# Altium PCB esp32c2_devboard.PcbDoc
Units mm, origin at the board's own origin, x right, y up, seen from the top; angles counter-clockwise.
Board outline 24.13 x 26.67 mm, 4 copper layers (Top Layer, Layer 1, Layer 2, Bottom Layer), stack 1.586 mm thick; 3 components, 18 nets, 81 pads, 42 vias.
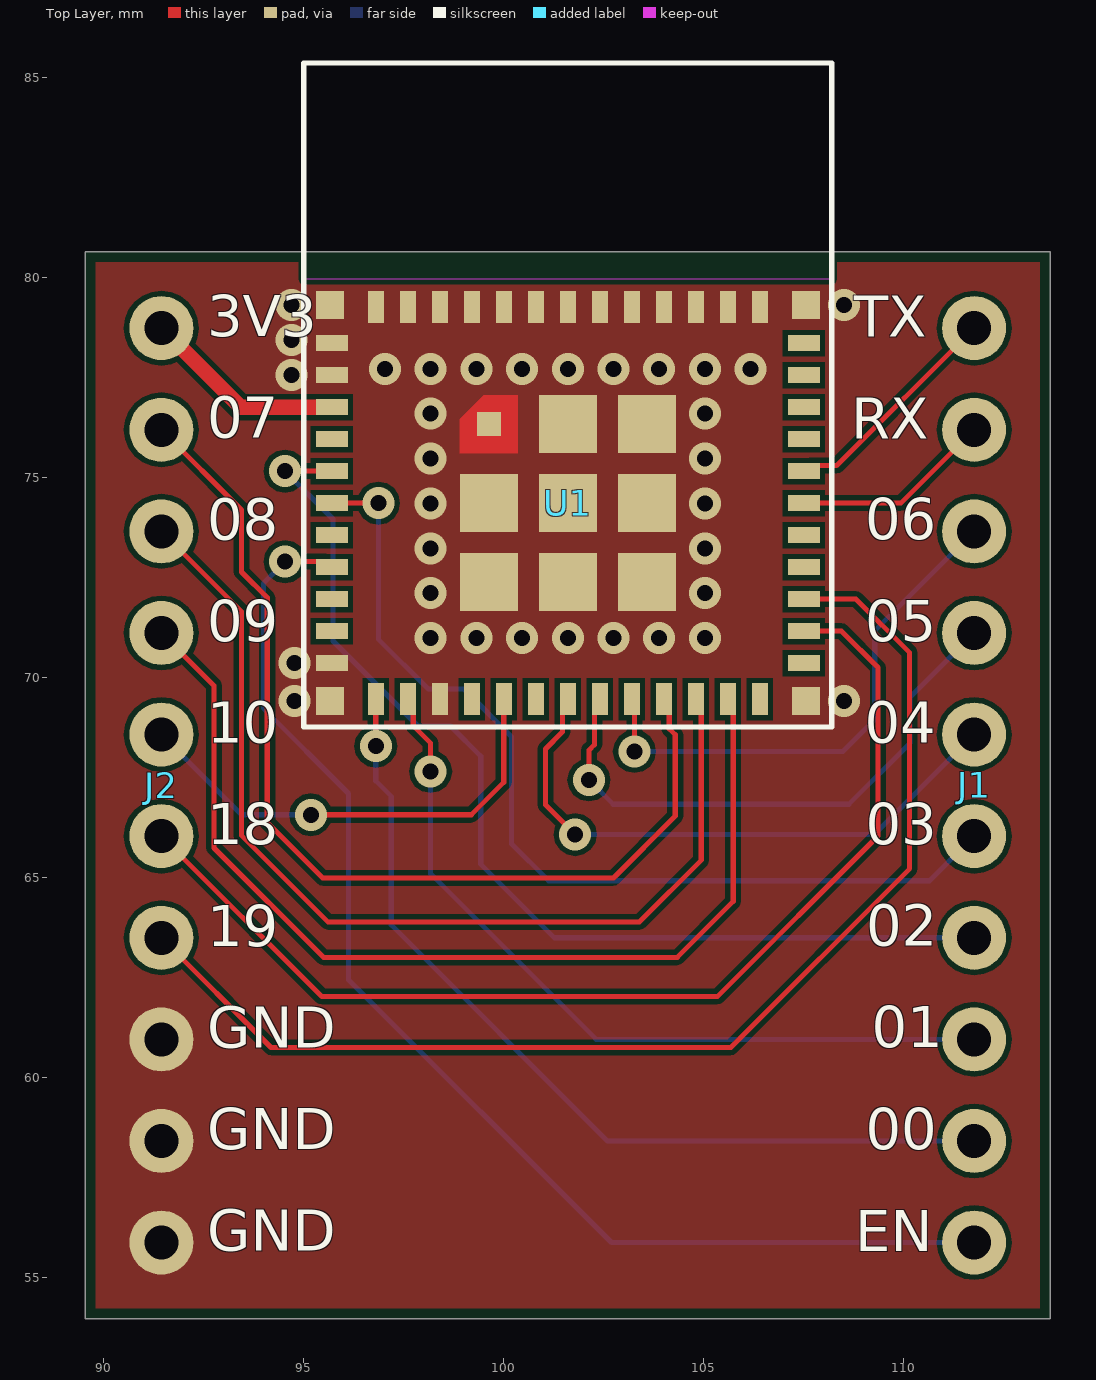
[diagram p0: Top Layer view]
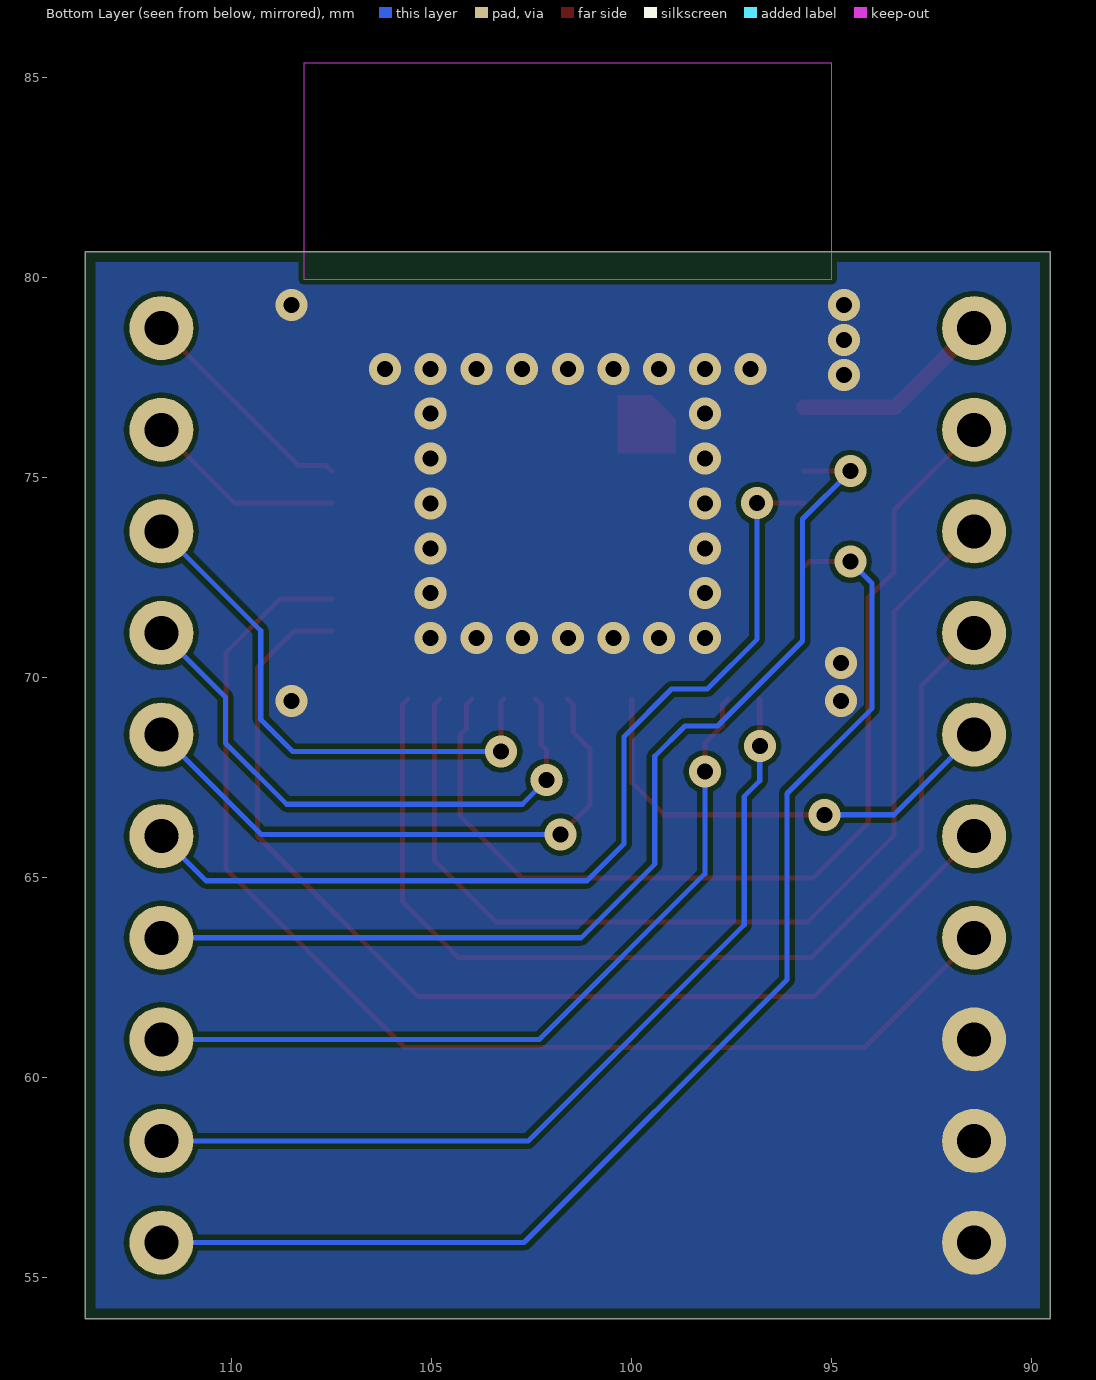
[diagram p1: Bottom Layer view, seen from below]
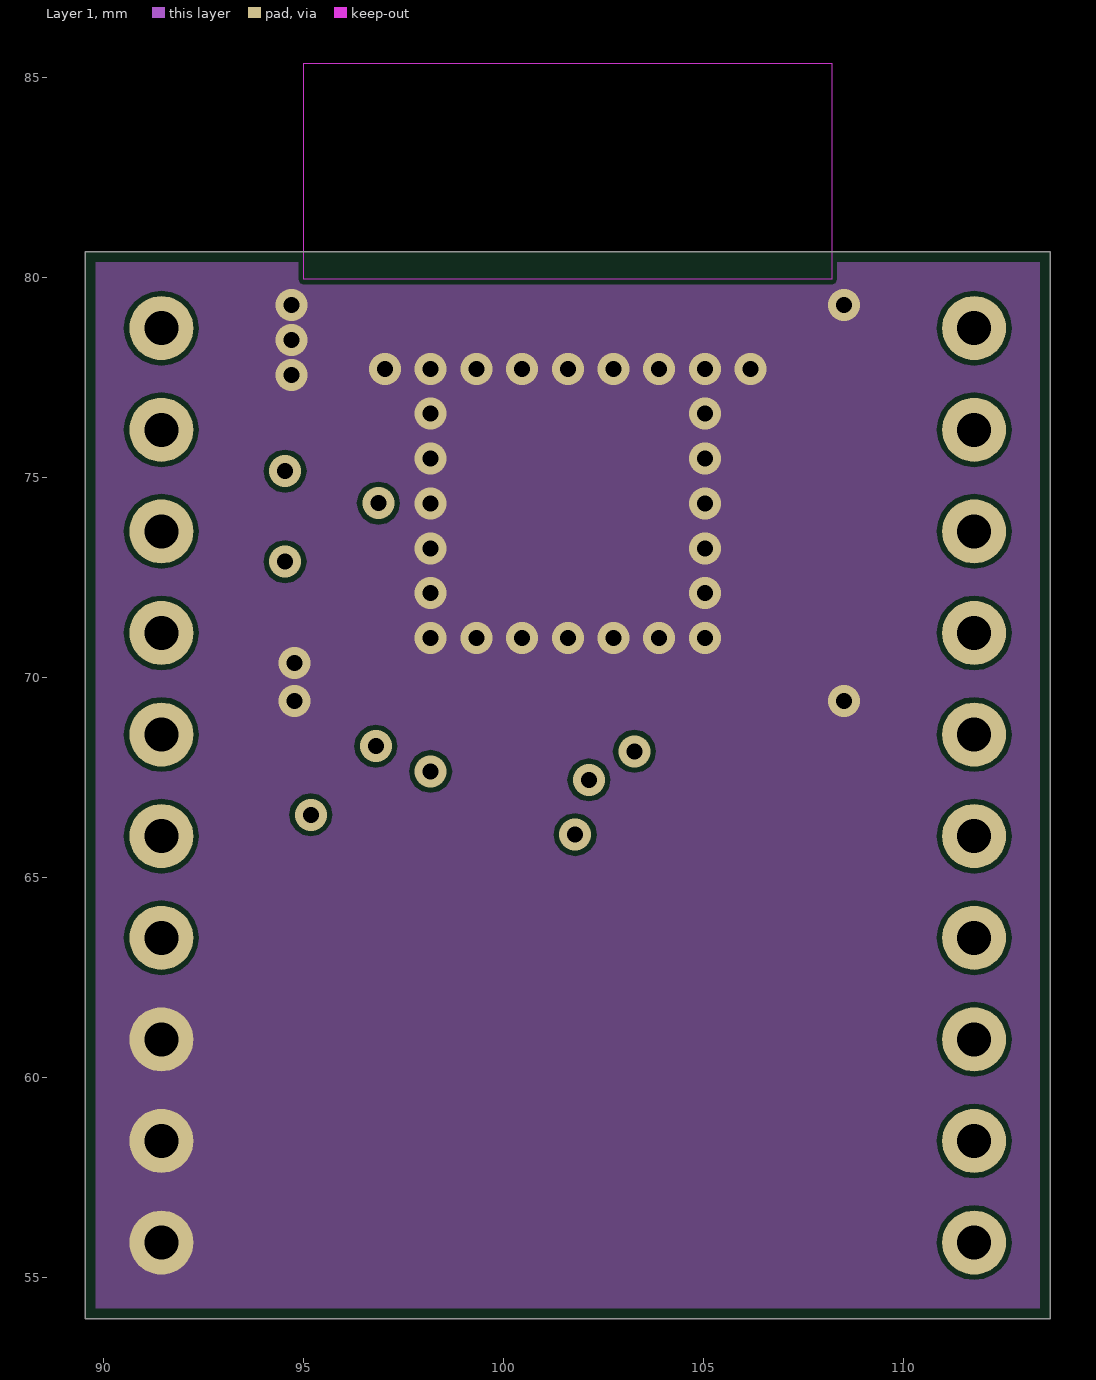
[diagram p2: Layer 1]
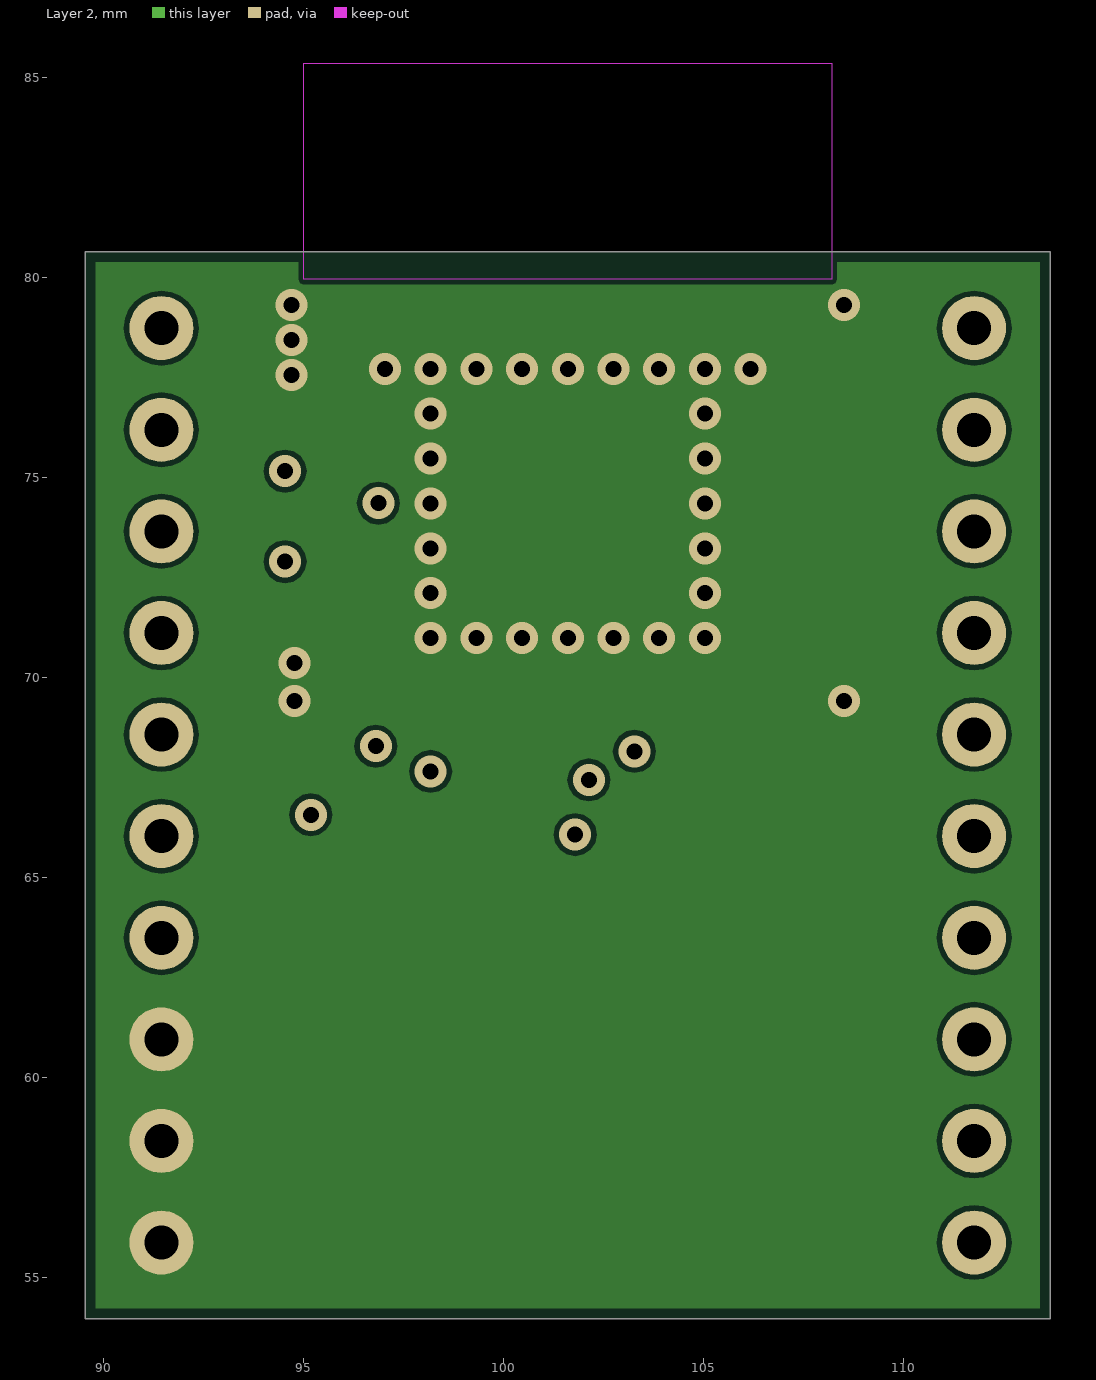
[diagram p3: Layer 2]

## Layer stack, top to bottom
Top Solder: solder mask 0.0254, SM-001, Dk 4
Top Layer: signal copper 0.035
Dielectric 2: prepreg 0.2104, PP-006, Dk 4.1
Layer 1: signal copper 0.0152
Dielectric 1: core 1.065, Core-043, Dk 4.3
Layer 2: signal copper 0.0152
Dielectric 3: prepreg 0.2104, PP-006, Dk 4.1
Bottom Layer: signal copper 0.035
Bottom Solder: solder mask 0.0254, SM-001, Dk 4

## Board outline
89.535,53.975 89.535,80.645 113.665,80.645 113.665,53.975

## Design rules (kind name [scope] priority, off if disabled: settings)
BoardOutlineClearance [OnSignal] p1: gap=0.254 ignorepadtopadclearanceinfootprint=FALSE
Clearance [All] p1: gap=0.127 ignorepadtopadclearanceinfootprint=FALSE
MinimumSolderMaskSliver [All] p1: minsoldermaskwidth=0.1
PolygonConnect PolygonConnect_Thermal [InNet('GND') vs InComponentClass('esp32c2_devboard') Or (InNet('GND') AND IsVia)] p1: connectstyle=Direct reliefconductorwidth=0.254 reliefentries=4 polygonreliefangle="90 Angle" airgapwidth=0.254
PolygonConnect [All] p2: connectstyle=Relief reliefconductorwidth=0.152 reliefentries=4 polygonreliefangle="90 Angle" airgapwidth=0.127
RoutingVias [All] p1: holewidth=0.711 width=1.27 viastyle="Through Hole" minholewidth=0.711 minwidth=1.27 maxholewidth=0.711 maxwidth=1.27 useviatemplates=TRUE viatemplateguid#1={FA8ABF8A-3428-4868-9827-40184CA6AFD4} viatemplatename#1=SIGNAL_VIA
SilkToSilkClearance [False] p1: silktosilkclearance=0.254
SilkToSolderMaskClearance [IsPad] p1: minsilkscreentomaskgap=0 clearancetoexposedcopper=TRUE
SolderMaskExpansion [All] p1: expansion=0.102 istentingtop=FALSE
Width [All] p1: maxlimit=0.508 minlimit=0.127 preferedwidth=0.254 toplayer_prefwidth=0.127 midlayer1_minwidth=0.254 midlayer1_maxwidth=0.254 midlayer2_minwidth=0.254 midlayer2_maxwidth=0.254 bottomlayer_prefwidth=0.127 minimp=50.000000 maximp=50.000000 favimp=50.000000
27 further rules are at their usual default settings.

## Classes and differential pairs
pad class Thermals: U1-49_1 U1-49_2 U1-49_3 U1-49_4 U1-49_5 U1-49_6 U1-49_7 U1-49_8 U1-49_9

## Components (designator, comment, footprint, x,y, rotation, side; value= is the part's Value field where it differs from the comment)
J1 "CON10" CON10 111.76,55.88 r90 top
J2 "CON10" CON10 91.44,78.74 r270 top
U1 "ESP32-C3-MINI-1-N4" XCVR_ESP32-C3-MINI-1-N4 101.6,77.065 r0 top

## Footprints (in the part's own frame and the unit in brackets; to place one, negate y for a bottom-side part, rotate by r counter-clockwise, add the part's x,y. Pads: shape width x height; smd on the part's side, far side on the other; paste and mask are expansions set on the pad)
CON10 [mm] "10 pin header"
  round 1.6 hole 0.85: 1(0,0) 2(2.54,0) 3(5.08,0) 4(7.62,0) 5(10.16,0) 6(12.7,0) 7(15.24,0) 8(17.78,0) 9(20.32,0) 10(22.86,0)
XCVR_ESP32-C3-MINI-1-N4 [mm]
  rect 0.8x0.4 smd: 1(-5.9,1.3) 2(-5.9,0.5) 3(-5.9,-0.3) 4(-5.9,-1.1) 5(-5.9,-1.9) 6(-5.9,-2.7) 7(-5.9,-3.5) 8(-5.9,-4.3) 9(-5.9,-5.1) 10(-5.9,-5.9) 11(-5.9,-6.7) 25(5.9,-6.7) 26(5.9,-5.9) 27(5.9,-5.1) 28(5.9,-4.3) 29(5.9,-3.5) 30(5.9,-2.7) 31(5.9,-1.9) 32(5.9,-1.1) 33(5.9,-0.3) 34(5.9,0.5) 35(5.9,1.3)
  rect 0.4x0.8 smd: 12(-4.8,-7.6) 13(-4,-7.6) 14(-3.2,-7.6) 15(-2.4,-7.6) 16(-1.6,-7.6) 17(-0.8,-7.6) 18(0,-7.6) 19(0.8,-7.6) 20(1.6,-7.6) 21(2.4,-7.6) 22(3.2,-7.6) 23(4,-7.6) 24(4.8,-7.6) 36(4.8,2.2) 37(4,2.2) 38(3.2,2.2) 39(2.4,2.2) 40(1.6,2.2) 41(0.8,2.2) 42(0,2.2) 43(-0.8,2.2) 44(-1.6,2.2) 45(-2.4,2.2) 46(-3.2,2.2) 47(-4,2.2) 48(-4.8,2.2)
  rect 0.6x0.6 smd paste-1 mask+0: 49_1(-1.975,-0.725)
  rect 1.45x1.45 smd: 49_2(0,-0.725) 49_3(1.975,-0.725) 49_4(1.975,-2.7) 49_5(1.975,-4.675) 49_6(0,-4.675) 49_7(-1.975,-4.675) 49_8(-1.975,-2.7) 49_9(0,-2.7)
  rect 0.7x0.7 smd: 50(5.95,2.25) 51(5.95,-7.65) 52(-5.95,-7.65) 53(-5.95,2.25)
  Top Layer region: -1.25,-1.45 -2.7,-1.45 -2.7,-0.6 -2.1,0 -1.25,0
  Keep-Out Layer region: 6.6,2.9 -6.6,2.9 -6.6,8.3 6.6,8.3
  Keep-Out Layer region: 6.6,2.9 -6.6,2.9 -6.6,8.3 6.6,8.3
  silkscreen extent -6.6,-8.3 6.6,8.3, body extent -6.6,-8.3 6.6,8.3, height 2.55

## Part data
U1: "Bluetooth, WiFi 802.11b/g/n, Bluetooth v5.0 Transceiver Module 2.412GHz ~ 2.484GHz PCB Trace Surface Mount", Package="SMD-53 Espressif Systems", Availability="In Stock", Check_prices=https://www.snapeda.com/parts/ESP32-C3-MINI-1-N4/Espressif+Systems/view-part/?ref=eda, MF="Espressif Systems", MP=ESP32-C3-MINI-1-N4, Price=None, Purchase-URL=https://pricing.snapeda.com/search/part/ESP32-C3-MINI-1-N4/?ref=eda, SnapEDA_Link=https://www.snapeda.com/parts/ESP32-C3-MINI-1-N4/Espressif+Systems/view-part/?ref=snap

## Via types
v1: diameter 0.8, hole 0.4, Top Layer to Bottom Layer, tented both sides, 42 vias

## Nets (pads, with @x,y where several pads share a name; then routed paths per layer and width w, separated by ;. In a path a pad name is that pad's centre, name@x,y a point inside that pad or via, vN(x,y) a via of type N, cw(c..) or ccw(c..) an arc to the next point about the centre after c; other vN are vias at no path point)
3V3: J2.1 U1.3 | length 5.1
  Top Layer w0.381: J2.1 93.415,76.765 U1.3
EN: J1.1 U1.8 | length 31.1
  Top Layer w0.127: v1(94.533,72.902) 95.563,72.902 U1.8
  Bottom Layer w0.127: v1(94.533,72.902) 93.99,72.359 93.99,69.239 96.121,67.108 96.121,62.451 102.692,55.88 J1.1
GND: J2.8 J2.9 J2.10 U1.1 U1.2 U1.11 U1.14 U1.36 U1.37 U1.38 U1.39 U1.40 U1.41 U1.42 U1.43 U1.44 U1.45 U1.46 U1.47 U1.48 U1.49_1 U1.49_2 U1.49_3 U1.49_4 U1.49_5 U1.49_6 U1.49_7 U1.49_8 U1.49_9 U1.50 U1.51 U1.52 U1.53
  other v1: 94.767,69.415 108.512,69.415 94.767,70.365 98.171,70.993 99.314,70.993 100.457,70.993 101.6,70.993 102.743,70.993 103.886,70.993 105.029,70.993 98.171,72.115 105.029,72.115 98.171,73.237 105.029,73.237 98.171,74.358 105.029,74.358 98.171,75.48 105.029,75.48 98.171,76.602 105.029,76.602 94.688,77.565 97.028,77.724 98.171,77.724 99.314,77.724 100.457,77.724 101.6,77.724 102.743,77.724 103.886,77.724 105.029,77.724 106.172,77.724 94.688,78.44 94.688,79.315 108.512,79.315
IO0: J1.2 U1.12 | length 22.6
  Top Layer w0.127: v1(96.8,68.288) U1.12
  Bottom Layer w0.127: v1(96.8,68.288) 96.8,67.423 97.188,67.034 97.188,63.822 102.591,58.42 J1.2
IO1: J1.3 U1.13 | length 19.9
  Top Layer w0.127: U1.13 97.736,69.328 97.736,68.8 98.172,68.364 v1(98.172,67.658)
  Bottom Layer w0.127: v1(98.172,67.658) 98.172,65.097 102.309,60.96 J1.3
IO2: J1.4 U1.5 | length 26.6
  Top Layer w0.127: v1(94.533,75.165) U1.5
  Bottom Layer w0.127: v1(94.533,75.165) 95.73,73.968 95.73,70.919 97.855,68.794 98.67,68.794 99.426,68.038 99.426,65.339 101.264,63.5 J1.4
IO3: J1.5 U1.6 | length 24
  Top Layer w0.127: U1.6 96.808,74.365 v1@96.84,74.333
  Bottom Layer w0.127: v1(96.865,74.365) 96.865,70.966 98.114,69.717 99.007,69.717 100.196,68.528 100.196,65.851 101.122,64.925 110.645,64.925 J1.5
IO4: J1.6 U1.18 | length 14.9
  Top Layer w0.127: U1.18 101.464,69.328 101.464,68.641 101.041,68.219 101.041,66.825 v1(101.786,66.08)
  Bottom Layer w0.127: v1(101.786,66.08) 109.26,66.08 J1.6
IO5: J1.7 U1.19 | length 14.5
  Top Layer w0.127: v1(102.129,67.445) 102.129,68.19 102.264,68.325 102.264,69.328 U1.19
  Bottom Layer w0.127: v1(102.129,67.445) 102.736,66.838 108.626,66.838 110.154,68.366 110.154,69.514 J1.7
IO6: J1.8 U1.20 | length 13.4
  Top Layer w0.127: U1.20 103.268,69.397 v1(103.268,68.161)
  Bottom Layer w0.127: v1(103.268,68.161) 104.201,68.161 108.479,68.161 109.275,68.957 109.275,71.175 J1.8
IO7: J2.2 U1.21 | length 25.4
  Top Layer w0.127: J2.2 93.445,74.195 93.445,72.646 94.087,72.004 94.087,66.383 95.474,64.997 102.741,64.997 104.287,66.543 104.287,68.575 104.136,68.726 104.136,69.328 U1.21
IO8: J2.3 U1.22 | length 25.5
  Top Layer w0.127: J2.3 93.447,71.653 93.447,66.052 95.601,63.899 103.396,63.899 104.937,65.44 104.937,69.328 U1.22
IO9: J2.4 U1.23 | length 25.7
  Top Layer w0.127: J2.4 92.758,69.802 92.758,65.745 95.492,63.011 104.337,63.011 105.736,64.411 105.736,69.328 U1.23
IO10: J2.5 U1.16 | length 11.8
  Top Layer w0.127: v1(95.175,66.575) 99.19,66.575 100,67.385 U1.16
  Bottom Layer w0.127: J2.5 93.445,66.575 v1(95.175,66.575)
IO18: J2.6 U1.26 | length 27.7
  Top Layer w0.127: J2.6 95.453,62.027 105.339,62.027 109.354,66.042 109.354,70.256 108.445,71.165 U1.26
IO19: J2.7 U1.27 | length 30.3
  Top Layer w0.127: J2.7 94.183,60.757 105.676,60.757 110.147,65.228 110.147,70.625 108.807,71.965 U1.27
RX: J1.9 U1.30 | length 5
  Top Layer w0.127: U1.30 109.925,74.365 J1.9
TX: J1.10 U1.31 | length 5.7
  Top Layer w0.127: U1.31 107.637,75.302 108.321,75.302 J1.10
pads on no net: U1.4 U1.7 U1.9 U1.10 U1.15 U1.17 U1.24 U1.25 U1.28 U1.29 U1.32 U1.33 U1.34 U1.35

## Polygon pours and split planes (outlines as drawn)
GND on Top Layer "GND_L01_P000" (solid, pour order 0): 89.535,80.645 89.535,53.975 113.665,53.975 113.665,80.645
GND on Bottom Layer "GND_L04_P001" (solid, pour order 1): 89.535,80.645 89.535,53.975 113.665,53.975 113.665,80.645
GND on Layer 1 "GND_L02_P002" (solid, pour order 2): 89.535,80.645 89.535,53.975 113.665,53.975 113.665,80.645
GND on Layer 2 "GND_L03_P003" (solid, pour order 3): 89.535,80.645 89.535,53.975 113.665,53.975 113.665,80.645

## Silkscreen, mask and mechanical layers (free items; w line width, h text height)
Top Overlay:
  text "3V3" at 92.583,78.2 h1.75
  text "TX" at 108.762,78.183 h1.75
  text "07" at 92.583,75.66 h1.75
  text "RX" at 108.688,75.643 h1.75
  text "08" at 92.583,73.119 h1.75
  text "06" at 109.037,73.12 h1.75
  text "09" at 92.583,70.578 h1.75
  text "05" at 109.032,70.58 h1.75
  text "10" at 92.583,68.037 h1.75
  text "04" at 109.023,68.04 h1.75
  text "18" at 92.583,65.496 h1.75
  text "03" at 109.047,65.5 h1.75
  text "19" at 92.583,62.956 h1.75
  text "02" at 109.057,62.96 h1.75
  text "GND" at 92.583,60.415 h1.75
  text "01" at 109.196,60.42 h1.75
  text "GND" at 92.583,57.874 h1.75
  text "00" at 109.055,57.88 h1.75
  text "GND" at 92.583,55.333 h1.75
  text "EN" at 108.783,55.323 h1.75
Board:
  the board outline again, w0.102